# Altium PCB PCB1.PcbDoc
Units mm, origin at the board's own origin, x right, y up, seen from the top; angles counter-clockwise.
Board outline 131 x 89 mm, 2 copper layers (Top Layer, Bottom Layer); 19 components, 19 nets, 68 pads, 0 vias.
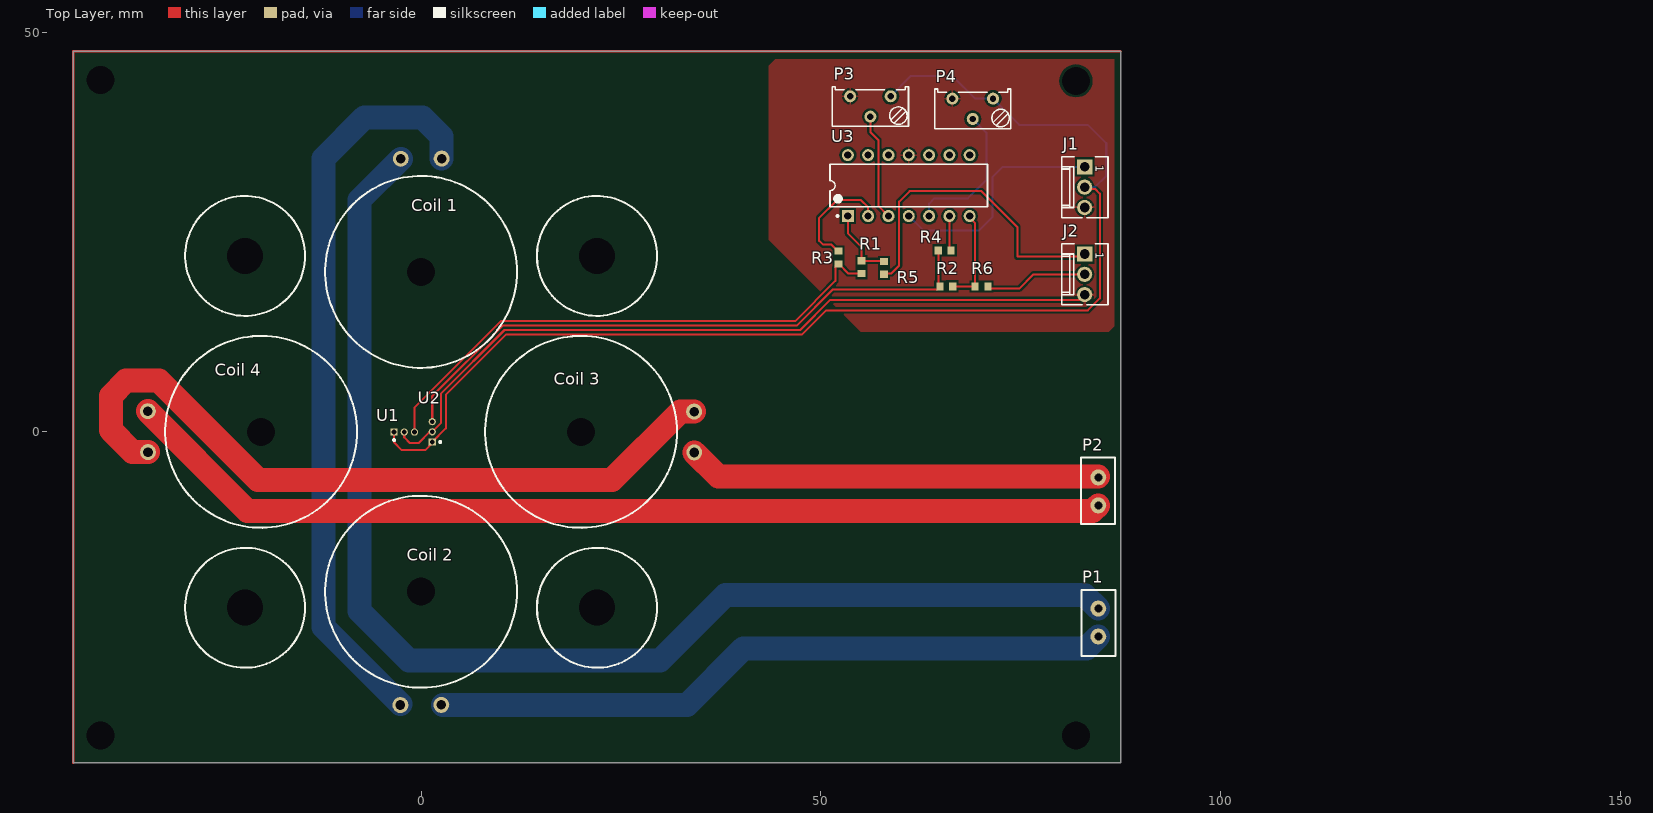
[diagram p0: Top Layer view]
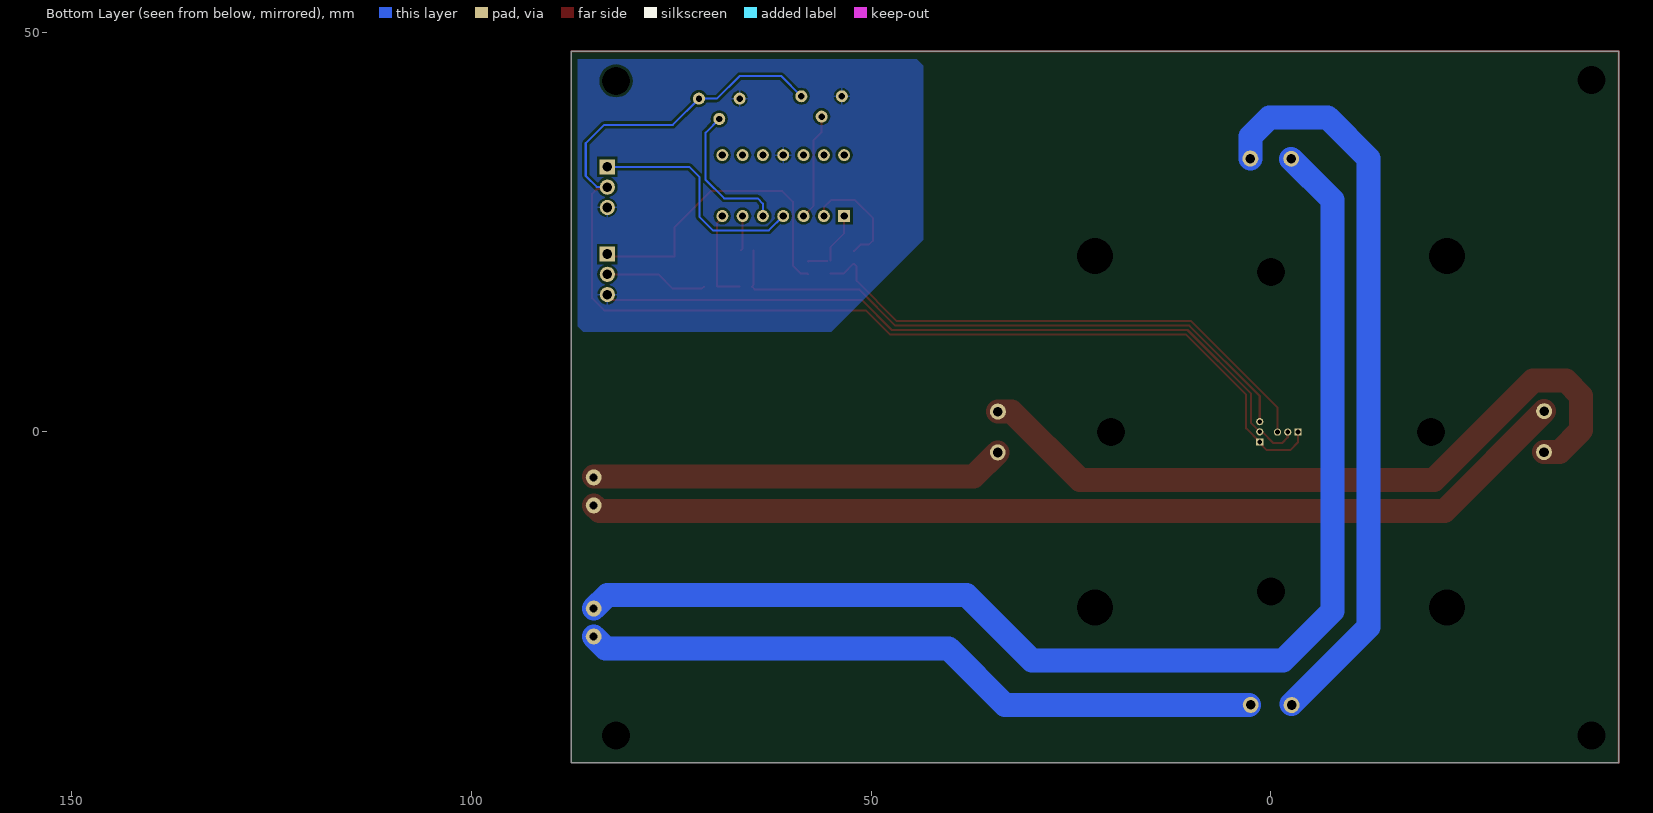
[diagram p1: Bottom Layer view, seen from below]
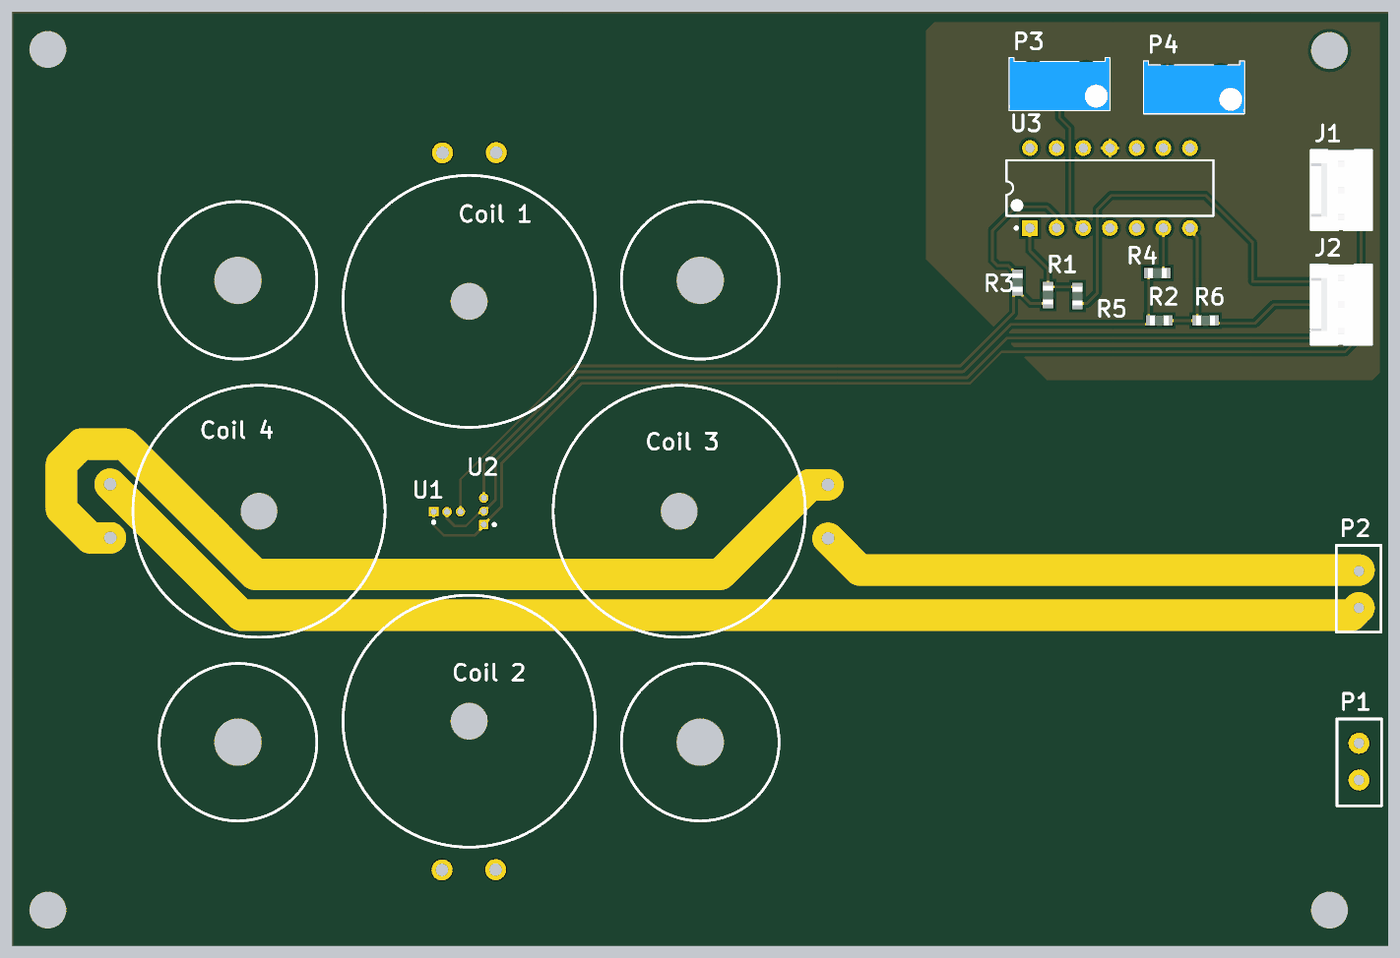
[diagram p2: 3D render of the assembled board from above, using the file's embedded part models]

## Layer stack, top to bottom
Top Solder: solder mask 0.0102, Solder Resist, Dk 3.5
Top Layer: signal copper 0.0356
Dielectric 1: dielectric 0.32, FR-4, Dk 4.8
Bottom Layer: signal copper 0.0356
Bottom Solder: solder mask 0.0102, Solder Resist, Dk 3.5

## Board outline
87.5,-41.4 -43.5,-41.4 -43.5,47.6 87.5,47.6

## Design rules (kind name [scope] priority, off if disabled: settings)
Clearance [All] p1: gap=0.3 ignorepadtopadclearanceinfootprint=FALSE
PolygonConnect [All] p1: connectstyle=Relief reliefconductorwidth=0.254 reliefentries=4 polygonreliefangle="90 Angle" airgapwidth=0.254
RoutingVias [All] p1: holewidth=0.711 width=1.27 viastyle="Through Hole" minholewidth=0.711 minwidth=1.27 maxholewidth=0.711 maxwidth=1.27
SolderMaskExpansion [All] p1: expansion=0.102
Width [All] p1: maxlimit=4 minlimit=0.254 preferedwidth=0.254
30 further rules are at their usual default settings.

## Components (designator, comment, footprint, x,y, rotation, side; value= is the part's Value field where it differs from the comment)
"Coil 1" "coil_big" coil_big_test 2.58,34.17 r180 top
"Coil 2" "coil_big" coil_big_test -2.58,-34.17 r0 top
"Coil 3" "coil_big" coil_big_test 34.17,-2.58 r90 top
"Coil 4" "coil_big" coil_big_test -34.17,2.58 r270 top
J1 "KK®" MOLEX_22-27-2031 83,30.6 r270 top
J2 "KK®" MOLEX_22-27-2031 83,19.7 r270 top
P1 "Connector" 350-021-14 84.7,-22.1 r270 top
P2 "Connector" 350-021-14 84.7,-9.2 r90 top
P3 "10k" TRIM_BOURNS_3296Y 56.2,40.7 r180 top value=10
P4 "10k" TRIM_BOURNS_3296Y 69,40.4 r180 top value=10
R1 "180k" RESC1608X55N 55.1,20.6 r270 top value=100k
R2 "180k" RESC1608X55N 65.7,18.173 r180 top value=100k
R3 "47k" RESC1608X55N 52.2,21.8 r270 top value=100k
R4 "47k" RESC1608X55N 65.5,22.7 r180 top value=100k
R5 "5.6k" RESC1608X55N 57.9,20.5 r270 top value=100k
R6 "5.6k" RESC1608X55N 70.1,18.173 r0 top value=100k
U1 "TLI4961-1L" INF-PG-SSO-3-2_V -2.1,0.1 r0 top
U2 "TLI4961-1L" INF-PG-SSO-3-2_V 1.26,0 r90 top
U3 "LM324N" N14A 61,30.8 r90 top

## Footprints (in the part's own frame and the unit in brackets; to place one, negate y for a bottom-side part, rotate by r counter-clockwise, add the part's x,y. Pads: shape width x height; smd on the part's side, far side on the other; paste and mask are expansions set on the pad)
350-021-14 [mm]
  round 2 hole 1: 1(0,0) 2(3.5,0)
  silkscreen extent -2.32,-2.1 5.96,2.15
coil_big_test [mm]
  round 1.524 hole 3.5: 0(2.58,14.17)
  round 2 hole 1.2: 1(0,0) 2(5.11,0.02)
  silkscreen extent -9.42,2.17 14.58,26.17
INF-PG-SSO-3-2_V [mm] "SSO, 3-Leads, Body 4.16x3.29mm, Pitch 1.27mm"
  rect 0.9x0.9 hole 0.6: 1(-1.27,-0.14)
  round 0.9 hole 0.6: 2(0,-0.14) 3(1.27,-0.14)
  silkscreen extent -1.39,-1.26 -1.14,-1.02, body extent -2.08,-0.76 2.08,0.76, height 3.37
MOLEX_22-27-2031 [mm] "2.54mm (.100\") Pitch KK® Header, Single Row, Vertical, 3 Circuits"
  rect 1.9x1.9 hole 1.2: 1(-2.54,0.005)
  round 1.9 hole 1.2: 2(0,0) 3(2.54,0)
  silkscreen extent -3.81,-2.87 3.81,2.93, body extent -3.81,-2.87 3.81,2.93, height 11.7
N14A [mm] "DIP, 14-Pin, Row Spacing 7.62 mm, Pitch 2.54 mm"
  rect 1.5x1.5 hole 0.9: 1(-3.81,7.62)
  round 1.5 hole 0.9: 2(-3.81,5.08) 3(-3.81,2.54) 4(-3.81,0) 5(-3.81,-2.54) 6(-3.81,-5.08) 7(-3.81,-7.62) 8(3.81,-7.62) 9(3.81,-5.08) 10(3.81,-2.54) 11(3.81,0) 12(3.81,2.54) 13(3.81,5.08) 14(3.81,7.62)
  silkscreen extent -3.93,-9.85 2.65,9.85, body extent -3.55,-9.85 3.55,9.85, height 5.08
RESC1608X55N [mm] "Chip Resistor, EIA 0603, Metric 1608, Body 1.6x0.8mm, IPC Medium Density"
  rect 0.9x1 smd: 1(-0.8,0) 2(0.8,0)
  body extent -0.87,-0.47 0.88,0.48, height 0.55
TRIM_BOURNS_3296Y [mm] "Trimming Potentiometer BOURNS 3296Y Series"
  round 1.5 hole 0.8: 1(-2.54,-1.27) 2(0,1.27) 3(2.54,-1.27)
  silkscreen extent -4.77,-2.48 4.77,2.49, body extent -4.76,-2.47 4.77,2.49, height 11.49

## Part data
J1 J2: library part MOLEX_22-27-2031, "Connector 3 Male", Manufacturer=MOLEX, Manufacturer Part Number=22-27-2031, Author="CERN DEM JLC", ComponentHeight=11.7mm, Component Type=Standard, CreateDate=04.12.2008, Family=KK®, HelpURL=\\cern.ch\dfs\Applications\Altium\Datasheets\MOLEX_22-27-2031.pdf, LatestRevisionDate=04.12.2008, Mounted=Yes, Part Description="2.54mm (.100\") Pitch KK® Wire-to-Board Header, Vertical, with Friction Lock, 3 Circuits, Tin (Sn) Plating", Part Number=MOLEX_22-27-2031, Pin Count=3, PressFit=No, Sense=No, SMD=No, Socket=No, Status=None
P1 P2: library part 350-021-14
P3 P4: library part TRIM_25T_10R_BOURNS_3296Y-1-100LF, "Trimming Potentiometer", Case=3296Y, Manufacturer=BOURNS, Manufacturer Part Number=3296Y-1-100LF, Power=0.5W, Tolerance=±10%, Author="CERN DEM JLC", ComponentHeight=11.55mm, Component Type=Standard, CreateDate=23.03.2015, HelpURL=\\cern.ch\dfs\Applications\Altium\Datasheets\TRIM_BOURNS_3296Y.pdf, LatestRevisionDate=23.03.2015, Mounted=Yes, Part Description="25 Turn Trimming Potentiometer (Top Adjustement)", Part Number=TRIM_25T_10R_BOURNS_3296Y-1-100LF, Pin Count=3, PressFit=No, Sense=No, SMD=No, Socket=No, TC=±100ppm/°C
R1 R2 R3 R4 R5 R6: library part R0603_100K_1%_0.1W_100PPM, "Resistor - 1%", Case=0603, Manufacturer=GENERIC, Manufacturer1 ComponentHeight=0.55mm, Manufacturer1 Example="NIC COMPONENT", Manufacturer1 Part Number=NRC06F1003TRF, Power=0.1W, Tolerance=±1%, Author="CERN DEM JLC", Component Type=Standard, CreateDate=03.12.2007, HelpURL=\\cern.ch\dfs\Applications\Altium\Datasheets\R0603_NIC_NRC.pdf, LatestRevisionDate=13.03.2008, Manufacturer Part Number=R0603_100K_1%_0.1W_100PPM, Mounted=Yes, Part Description="General Purpose Thick Film Chip Resistor", Part Number=R0603_100K_1%_0.1W_100PPM, Pin Count=2, PressFit=No, Sense=No, SMD=Yes, Socket=No, Status=Preferred, TC=±100ppm/°C
U1 U2: "Hall Effect Latch for Industrial Applications, -40 to 125 degC, PG-SSO-3-2, AMMO-PACK, Green", Manufacturer=Infineon, Bhyst (25degreesC) max="4 mT", Bop (25degreesC) min="2 mT", Brp (25degreesC) typ="-2 mT", Chopped Hall Technology=TRUE, ComponentLink1Description="Manufacturer URL", ComponentLink1URL=http://www.infineon.com/, ComponentLink2Description=Datasheet, ComponentLink2URL=http://www.infineon.com/dgdl/TLI4961-1_DS_Rev1.1.pdf?folderId=db3a30431ce5fb52011d29818c631b6b&fileId=db3a304338e5bb6e0138e7ae76540244, ComponentLink3Description="Package Specification", ComponentLink3URL=http://www.infineon.com/dgdl/TLE4961-1L_DS_Rev1.0.pdf?folderId=db3a30431ce5fb52011d29818c631b6b&fileId=db3a3043397219b6013977b435505444, DatasheetVersion="Rev. 1.1", Direction Detection=FALSE, Green=TRUE, Interface="open collector", Mounting Technology="Through Hole", PackageDescription="3-Pin Plastic (Green) Single Small Outline, 4.16 x 3.29 mm Body, 1.27 mm Pitch", PackageReference=PG-SSO-3-2, PackageVersion=Jul-12, Packing=AMMO-PACK, PartNumber=TLI4961-1L, Target Application=Industrial, Type=Latch
U3: "Low Power Quad Operational Amplifier, 14-pin MDIP", Manufacturer="National Semiconductor", PackageTopMarking=NSUZXYYTTE#*LM324N, PowerWise=N, Code_JEDEC=MS-001-AA, ComponentLink1Description="Manufacturer URL", ComponentLink1URL=http://www.national.com/, ComponentLink2Description="LM324 Datasheet", ComponentLink2URL=http://www.national.com/ds/LM/LM324.pdf, ComponentLink3Description="LM324 Web Page", ComponentLink3URL=http://www.national.com/pf/LM/LM324.html, ComponentLink4Description="N14A Package Page", ComponentLink4URL=http://www.national.com/packaging/folders/n14a.html, CompType=Amplifiers, DatasheetVersion=Aug-2000, High-Reliability=Y, PackageDescription="MDIP, .750 x .250 x.130in, 14 Lead, .100in Pitch", PackageReference=N14A, PackageVersion="revG, May-2006", PartNumber=LM324N, PinCount=14, RoHS=N

## Free pads (board coordinates)
  round 1.524 hole 3.5: 8(-40.1,-38) 8(-40.1,44) 8(81.9,-38) 8(81.9,43.9)
  round 1.524 hole 4.5: 8(-22,-22) 8(-22,22) 8(22,-22) 8(22,22)

## Nets (pads, with @x,y where several pads share a name; then routed paths per layer and width w, separated by ;. In a path a pad name is that pad's centre, name@x,y a point inside that pad or via, vN(x,y) a via of type N, cw(c..) or ccw(c..) an arc to the next point about the centre after c; other vN are vias at no path point)
+5: J1.2 P3.1 P4.1 U1.1 U2.1 | length 154.6
  Top Layer w0.254: U1.1 -3.37,-1.33 -2.4,-2.3 0.5,-2.3 1.4,-1.4 U2.1 3.1,0.43 3.1,4.617 10.667,12.184 47.667,12.184 50.683,15.2 83.4,15.2 84.9,16.7 84.9,29.8 84.331,30.369 83.231,30.369 J1.2
  Bottom Layer w0.254: P3.1 61.27,44.5 66.46,44.5 69.29,41.67 P4.1 74.81,38.4 83.4,38.4 85.7,36.1 85.7,32 84.331,30.631 83.031,30.631 J1.2
+12: J1.1 U3.4 | length 29
  Bottom Layer w0.254: U3.4 62.79,25.2 69.8,25.2 71.5,26.9 71.5,31.9 72.74,33.14 J1.1
GND: J1.3 J2.3 P3.3 P4.3 U1.2 U2.2 U3.11 | length 95.9
  Top Layer w0.254: U1.2 -2.1,-0.7 -1.4,-1.4 -0.3,-1.4 1.1,0 U2.2 2.509,1.109 2.509,4.809 10.438,12.738 47.438,12.738 51.2,16.5 82.34,16.5 J2.3
"NetCoil 1_1": "Coil 1.1" "Coil 2.1" | length 93
  Bottom Layer w0.254: -2.58,-34.17 -2.58,-34.02
  Bottom Layer w3: -2.58,-34.02 -12.2,-24.4 -12.2,34.2 -7.1,39.3 0.2,39.3 2.58,36.92 2.58,34.17
"NetCoil 1_2": "Coil 1.2" P1.1 | length 157.8
  Bottom Layer w3: -2.53,34.15 -7.7,28.98 -7.7,-22.4 -1.5,-28.6 5.3,-28.6 29.9,-28.6 38.1,-20.4 83,-20.4 P1.1
"NetCoil 2_2": "Coil 2.2" P1.2 | length 85.5
  Bottom Layer w3: 2.741,-34.15 33.25,-34.15 40.3,-27.1 83.2,-27.1 P1.2
"NetCoil 3_1": "Coil 3.1" P2.2 | length 51.8
  Top Layer w3: 34.17,-2.58 37.19,-5.6 P2.2@84.7,-5.6
"NetCoil 3_2": "Coil 3.2" "Coil 4.2" | length 92.5
  Top Layer w3: -34.15,-2.53 -36.07,-2.53 -38.8,0.2 -38.8,4.5 -36.9,6.4 -32.8,6.4 -20.4,-6 23.9,-6 32.43,2.53 34.15,2.53
"NetCoil 4_1": "Coil 4.1" P2.1 | length 124.3
  Top Layer w3: -34.17,2.58 -21.69,-9.9 84,-9.9 P2.1
NetJ2_1: J2.1 R5.2 | length 39.8
  Top Layer w0.254: R5.2 58,19.8 58.8,19.8 59.8,20.8 59.8,28.8 61.1,30.1 70.1,30.1 74.577,25.623 74.577,21.9 82.665,21.9 J2.1
NetJ2_2: J2.2 R6.2 | length 13
  Top Layer w0.254: R6.2 71.173,17.9 74.8,17.9 76.6,19.7 J2.2
NetP3_2: P3.2 U3.3 | length 13.4
  Top Layer w0.254: P3.2 56.2,37.5 57.2,36.5 57.2,28.25 U3.3
NetP4_2: P4.2 U3.5 | length 18.3
  Bottom Layer w0.254: U3.5 63.54,28.54 64.2,29.2 68.4,29.2 70.7,31.5 70.7,37.43 P4.2
NetR1_1: R1.1 R5.1 U3.1 | length 8.8
  Top Layer w0.254: U3.1 53.38,24.82 55.1,23.1 R1.1 ; R1.1@55.473,21.377 57.823,21.377 R5.1
NetR1_2: R1.2 R3.2 U1.3 | length 68
  Top Layer w0.254: U1.3 -0.83,3.037 9.979,13.846 46.781,13.846 51.827,18.892 51.827,20.677 52.15,21 R3.2 52.25,21 53.45,19.8 R1.2
NetR2_1: R2.1 R6.1 U3.7 | length 11.9
  Top Layer w0.254: R2.1 R6.1 69.3,26.071 68.62,26.751 U3.7
NetR2_2: R2.2 R4.2 U2.3 | length 77
  Top Layer w0.254: U2.3 1.4,4.483 10.209,13.292 47.01,13.292 51.518,17.8 64.577,17.8 64.9,18.123 R2.2 64.7,18.373 R4.2
NetR3_1: R3.1 U3.2 | length 14.3
  Top Layer w0.254: 51.9,28.851 49.8,26.751 49.8,23.9 50.288,23.412 51.338,23.412 52.15,22.6 R3.1 ; 51.9,28.851 52.049,29 55,29 55.92,28.08 U3.2
NetR4_1: R4.1 U3.6 | length 4.4
  Top Layer w0.254: U3.6 66.08,22.92 R4.1 R4.1@66.3,22.65
pads on no net: "Coil 1.0" "Coil 2.0" "Coil 3.0" "Coil 4.0" U3.8 U3.9 U3.10 U3.12 U3.13 U3.14
copper on no net: | length 220
  Top Layer w0.254: -43.5,-41.4 -43.5,47.6 87.5,47.6

## Polygon pours and split planes (outlines as drawn)
GND on Bottom Layer "Top Layer-No Net 1" (solid, pour order 2): 43.5,24 43.5,45.8 44.3,46.6 86.7,46.6 86.7,13.2 86,12.5 55,12.5
GND on Top Layer "Top Layer-No Net" (solid, pour order 4): 43.5,24 43.5,45.8 44.3,46.6 86.7,46.6 86.7,13.2 86,12.5 55,12.5

## Other copper
Top Layer:
  region: 149.8,26.2

## Silkscreen, mask and mechanical layers (free items; w line width, h text height)
Top Overlay:
  circle w0.254: c22,22 r7.5
  circle w0.254: c22,-22 r7.5
  circle w0.254: c-22,-22 r7.5
  circle w0.254: c-22,22 r7.5
Top Solder:
  lines w3: -34.17,2.58 -21.69,-9.9 84,-9.9 84.7,-9.2 ; -34.15,-2.53 -36.07,-2.53 -38.8,0.2 -38.8,4.5 -36.9,6.4 -32.8,6.4 -20.4,-6 23.9,-6 32.43,2.53 34.15,2.53 ; 34.17,-2.58 37.19,-5.6 84.7,-5.6
Bottom Solder:
  lines w3: -2.58,-34.02 -12.2,-24.4 -12.2,34.2 -7.1,39.3 0.2,39.3 2.58,36.92 2.58,34.17 ; -2.53,34.15 -7.7,28.98 -7.7,-22.4 -1.5,-28.6 5.3,-28.6 29.9,-28.6 38.1,-20.4 83,-20.4 84.7,-22.1 ; 2.741,-34.15 33.25,-34.15 40.3,-27.1 83.2,-27.1 84.7,-25.6
Mechanical 1:
  lines w0.254: -43.5,-41.4 87.5,-41.4 87.5,47.6

## Text inside footprints (layer, text, board x,y; h text height)
J1: Top Overlay "1" at 84.4,33.35 h1 r270; Mechanical 14 "1" at 84.4,33.35 h1 r270
J2: Top Overlay "1" at 84.4,22.45 h1 r270; Mechanical 14 "1" at 84.4,22.45 h1 r270